# Altium PCB arm_board_n.PcbDoc (part 2 of 3)
Units mm, origin at the board's own origin, x right, y up, seen from the top; angles counter-clockwise.
Board outline 101.22 x 59.56 mm, 4 copper layers (Top Layer, Int1 (GND), Int2 (PWR), Bottom Layer), stack 1.565 mm thick; 88 components, 104 nets, 470 pads, 175 vias.
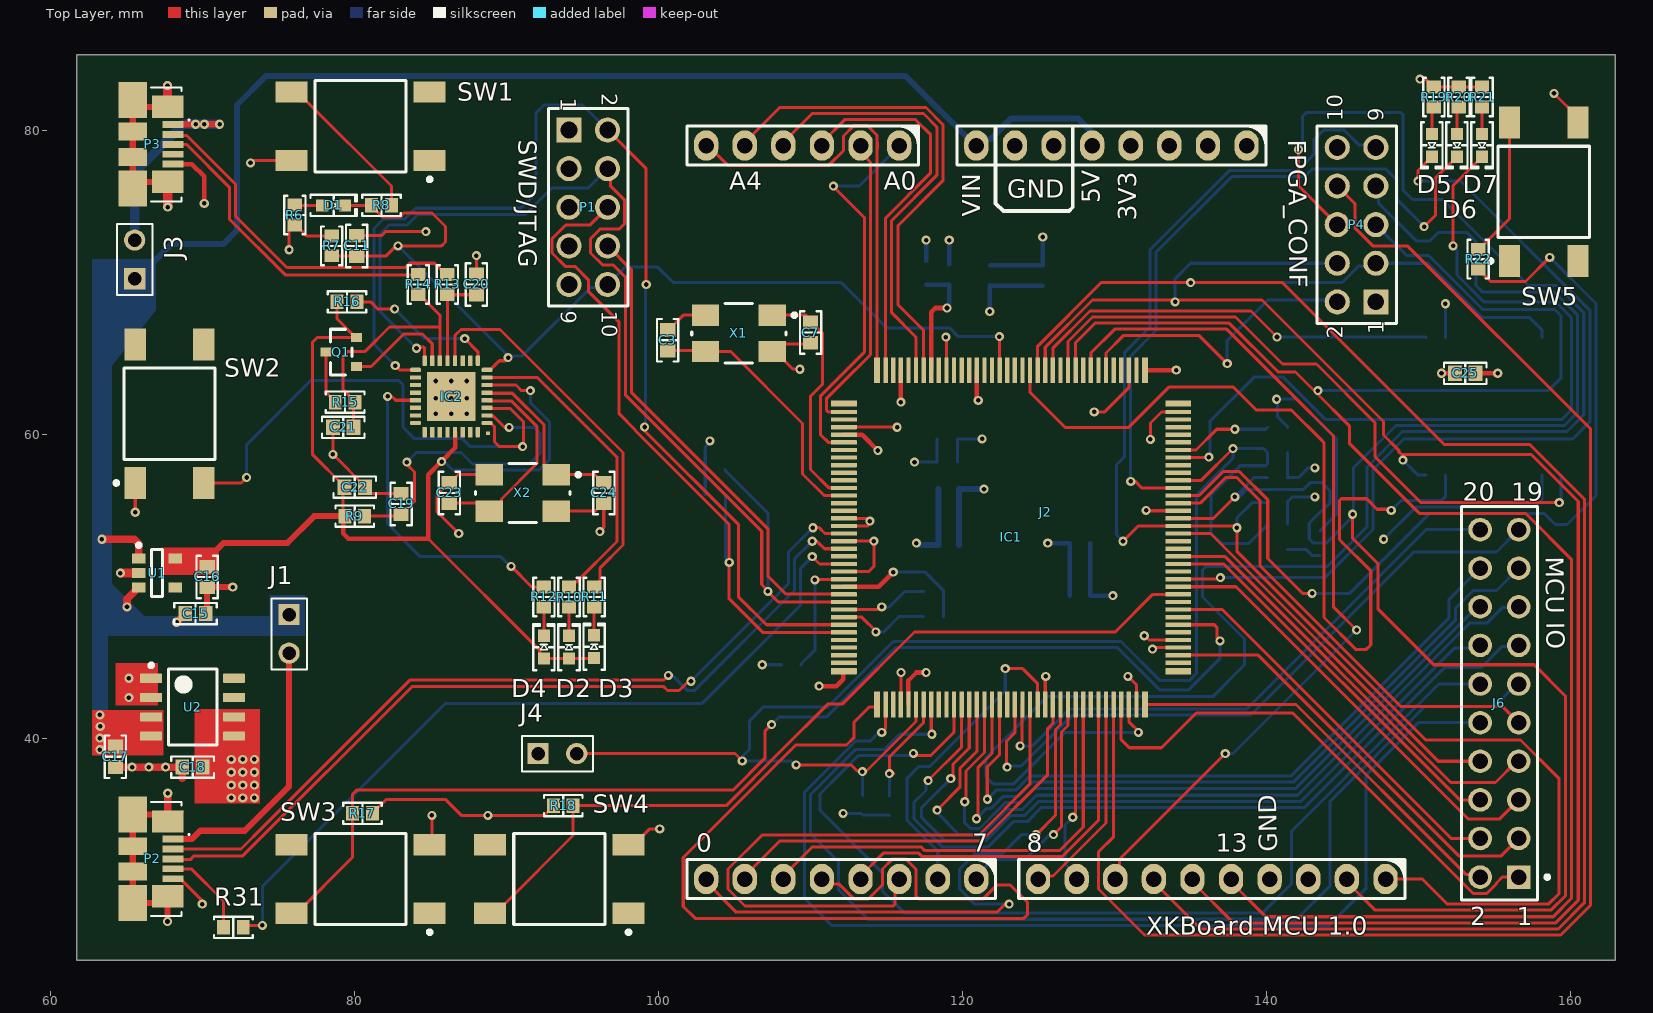
[diagram p0: Top Layer view]

## Part data (continued)
X1 X2: library part CMP-0277-00003-1, "Ceramic Surface Mount Low Profile Quartz Crystal, 8 MHz, -20 to 70 degC, 4-Pin 6 x 3.6 x 1.2 mm SMD, RoHS, 1000pcs / Reel", Frequency="8 MHz", Load Capacitance CL="18 pF Typ.", Manufacturer=Abracon, PartNumber=ABMM2-8.000MHZ-E2-T, Shunt Capacitance C0="7 pF Max.", Temperature Range="-20 to 70 degC", ComponentLink1Description="Manufacturer URL", ComponentLink1URL=http://www.abracon.com/, ComponentLink2Description=Datasheet, ComponentLink2URL=http://www.abracon.com/Resonators/ABMM2.pdf, ComponentLink3Description="Package Specification", ComponentLink3URL=http://www.abracon.com/Resonators/ABMM2.pdf, DatasheetVersion=Jan-13, ESR="72 Ohm Max.", Mounting Technology="Surface Mount", PackageDescription="4-Pin SMD, Body 6 x 3.6 mm, Pitch 4.4 mm", Packing="1000pcs / Reel", RoHS=TRUE

## Via types
v1: diameter 0.6, hole 0.3, Top Layer to Bottom Layer, 175 vias

## Nets (pads, with @x,y where several pads share a name; then routed paths per layer and width w, separated by ;. In a path a pad name is that pad's centre, name@x,y a point inside that pad or via, vN(x,y) a via of type N, cw(c..) or ccw(c..) an arc to the next point about the centre after c; other vN are vias at no path point)
3V3_DEBUG: C16.2 C22.2 D2.1 D3.1 D4.1 IC2.6 IC2.29 Q1.2 R9.2 R16.1 U1.5 | length 74.1
  Top Layer w0.2: C16.2@69.901,51.687 69.901,51.637 70.251,51.287 C16.2@70.301,51.287 ; R16.1@78.852,68.707 78.852,67.574 Q1.2@80.071,66.355 ; R9.2@79.36,54.61 79.248,54.61 79.248,56.428 C22.2@79.335,56.515 79.335,56.565 77.216,58.684 77.216,66.04 77.531,66.355 Q1.2@80.071,66.355 ; Q1.2@80.121,66.355 Q1.2@80.071,66.355 ; 84.836,53.135 92.182,45.789 92.182,45.513 D4.1@92.456,45.239 94.107,45.239 95.728,45.239 D3.1@95.758,45.269 ; IC2.6@88.71,63.234 90.614,63.234 90.983,62.865 v1(91.567,62.865)
  Top Layer w0.3: R9.2@79.248,54.61 79.248,53.467 79.58,53.135 84.836,53.135 84.836,57.332 85.705,58.201 v1(85.723,58.201) ; v1@85.723,58.219 86.61,59.106 IC2.29@86.61,60.134
  Top Layer w0.4: 69.723,52.197 70.722,52.197 71.378,52.853 75.586,52.853 77.343,54.61 R9.2@79.248,54.61
  Bottom Layer w0.2: v1(85.723,58.201) 85.73,58.208 85.896,58.208 86.465,57.639 92.139,57.639 92.837,58.337 92.837,60.797 91.567,62.067 v1(91.567,62.865)
3V3_MCU: C1.2 C2.2 C4.2 C5.2 C6.2 C8.2 C9.2 C10.2 C12.2 C13.2 C14.2 C18.2 C25.2 FB1.1 IC1.P5 IC1.P16 IC1.P17 IC1.P25 IC1.P36 IC1.P41 IC1.P59 IC1.P71 IC1.P77 IC1.P94 IC1.P107 IC1.P111 IC1.P131 IC1.P141 J2.2 J2.4 P1.1 R2.2 R3.2 R4.2 R5.2 R6.2 R7.1 R17.2 R18.2 R19.1 R20.1 R21.1 R23.2 R24.2 R25.2 R26.2 U2.5 U2.6 U3.2 | length 108
  Top Layer w0.2: v1(75.692,72.136) 75.692,73.391 75.698,73.397 75.698,73.447 76.023,73.772 R6.2@76.073,73.772 76.123,73.772 76.855,73.04 R7.1@78.486,73.04 ; R17.2@81.168,35.052 82.07,35.954 86.005,35.954 87.057,34.902 92.468,34.902 93.076,35.51 R18.2@93.076,35.56 ; IC1.P36@112.143,44.303 112.19,44.35 IC1.P36@112.19,44.403 ; IC1.P17@112.19,53.963 113.766,53.963 113.899,54.096 v1(113.899,54.279) 113.715,54.463 IC1.P16@112.19,54.463 ; v1(114.427,58.928) v1@114.479,58.928 ; v1@120.94,62.429 121.031,62.338 v1(121.031,62.23) ; IC1.P59@125.44,42.213 125.44,44.033 v1(125.476,44.069) ; v1(128.667,61.468) 129.353,61.468 130.94,63.055 IC1.P111@130.94,64.213 ; v1(130.883,44.069) 131.44,43.512 IC1.P71@131.44,42.213 ; v1(131.953,46.736) 131.997,46.736 132.27,46.463 IC1.P77@134.19,46.463 ; v1(132.08,54.991) 132.108,54.963 IC1.P94@134.19,54.963 ; v1(132.36,59.664) 132.36,60.732 133.091,61.463 IC1.P107@134.19,61.463 ; v1(150.096,83.359) 150.478,83.359 R19.1@151.003,82.834 R20.1@152.654,82.834 R21.1@154.178,82.834
  Top Layer w0.3: v1(110.562,43.425) 111.687,43.425 112.143,43.881 IC1.P36@112.143,44.303 ; IC1.P25@112.19,49.963 114.479,49.963 v1(115.443,50.927) ; IC1.P5@112.19,59.963 113.392,59.963 v1(114.427,58.928) ; v1(115.94,62.114) IC1.P141@115.94,64.213 ; IC1.P41@116.44,42.213 116.44,43.796 116.967,44.323 v1(117.602,44.323) ; v1@120.94,62.429 IC1.P131@120.94,64.213 ; C25.2@153.75,64.008 v1(155.214,64.008)
  Bottom Layer w0.2: R3.2@103.072,56.032 R2.2@103.072,57.683 103.072,59.17 103.378,59.476 v1(103.378,59.563) ; v1(115.443,50.927) 117.54,50.927 118.76,49.707 R4.2@118.76,49.657 118.745,49.642 R5.2@118.745,48.006 ; v1(116.84,58.166) C1.2@118.324,58.166 C2.2@118.324,59.69 ; C14.2@121.793,71.16 C14.2@121.833,71.12 ; C10.2@128.397,49.378 C10.2@128.452,49.323 ; v1(129.896,49.378) v1@129.921,49.403 ; R23.2@141.366,58.801 141.366,57.165 R25.2@141.351,57.15 142.113,57.15 142.748,57.785 v1(143.184,57.785) ; R24.2@141.381,54.102 141.366,54.117 R26.2@141.366,55.499 141.366,55.549 141.691,55.874 143.178,55.874 v1(143.184,55.88) ; v1(147.701,53.086) 149.811,55.196 157.637,55.196 158.115,55.674 U3.2@158.115,57.324
  Bottom Layer w0.3: FB1.1@117.602,71.414 v1(117.602,72.771) ; C14.2@121.833,71.12 C13.2@123.546,71.12 C12.2@125.273,71.12 v1(125.273,72.974) ; C8.2@128.397,52.832 C9.2@128.397,51.105 C10.2@128.397,49.378 v1(129.896,49.378)
  Bottom Layer w0.4: v1(116.967,52.832) 117.021,52.832 117.148,52.705 C4.2@118.411,52.705 C5.2@118.411,54.483 C6.2@118.411,56.388
  other v1: 88.773,34.925 71.882,36.068 72.644,36.068 73.406,36.068 71.882,36.915 72.644,36.915 73.406,36.915 71.882,37.761 72.644,37.761 73.406,37.761 71.882,38.608 72.644,38.608 73.406,38.608
5V: C15.2 C17.2 J1.1 J2.5 J2.8 J3.1 U1.1 U1.3 U2.3 U2.4 | length 90
  Top Layer w0.2: 64.262,40.448 64.578,40.132
  Top Layer w0.5: v1(63.373,53.086) 65.506,53.086 65.799,52.793 U1.1@65.799,51.816 ; C17.2@64.262,39.45 64.262,40.448 64.262,41.446 66.573,41.446 U2.3@66.617,41.402 ; 64.578,40.132 U2.4@66.617,40.132 ; v1(65.024,48.641) 65.024,49.141 U1.3@65.799,49.916 ; v1(68.29,47.625) C15.2@68.864,48.199
  Bottom Layer w0.2: 128.367,80.008 128.367,79.155 J2.5@128.528,78.994
  Bottom Layer w0.3: J2.8@120.822,78.994 J2.8@120.908,78.994 121.337,79.423 121.847,79.423
  Bottom Layer w0.4: J3.1@65.532,70.231 66.031,70.73 66.158,70.73 67.935,72.507 71.364,72.507 72.263,73.406 72.263,81.661 74.168,83.566 116.25,83.566 J2.8@120.822,78.994 ; 121.847,79.423 123.206,80.782 127.593,80.782 128.367,80.008
  other v1: 63.246,39.243 63.246,40.005 63.262,40.771 63.246,41.529
A10: IC1.P38 J6.10 | length 70.7
  Top Layer w0.2: v1(114.681,40.386) 114.94,40.645 IC1.P38@114.94,42.213
  Bottom Layer w0.2: v1(114.681,40.386) 114.499,40.386 113.929,39.816 112.968,39.816 109.601,36.449 109.601,29.464 111.379,27.686 144.119,27.686 146.558,30.125 146.558,37.592 149.987,41.021 J6.10@154.051,41.021
A11: IC1.P44 J6.11 | length 73.8
  Top Layer w0.2: IC1.P44@117.94,42.213 117.94,40.302 v1(117.983,40.259)
  Bottom Layer w0.2: v1(117.983,40.259) 115.876,40.259 114.879,39.262 112.98,39.262 110.006,36.288 110.006,33.694 111.848,31.853 111.848,30.011 113.773,28.086 141.979,28.086 144.184,30.291 144.184,35.853 150.427,42.096 154.999,42.096 156.464,43.561 J6.11@156.591,43.561
A12: IC1.P47 J6.12 | length 68.8
  Top Layer w0.2: v1(116.765,39.003) 116.883,38.886 116.883,38.862 117.908,38.862 119.44,40.394 IC1.P47@119.44,42.213
  Bottom Layer w0.2: v1(116.765,39.003) 116.765,38.979 116.648,38.862 113.145,38.862 112.014,37.731 110.617,36.334 110.617,35.254 114.724,31.147 114.724,29.951 116.189,28.486 139.716,28.486 141.644,30.414 141.644,33.879 151.326,43.561 J6.12@154.051,43.561
A13: IC1.P48 J6.13 | length 54.8
  Top Layer w0.2: v1(117.729,37.211) 119.94,39.422 IC1.P48@119.94,42.213
  Bottom Layer w0.2: v1(117.729,37.211) 117.591,37.073 117.591,36.559 116.808,35.775 116.808,34.703 118.656,32.855 121.686,32.855 123.338,34.507 124.261,34.507 125.2,35.446 142.507,35.446 151.697,44.636 154.106,44.636 155.516,46.046 156.536,46.046 J6.13@156.591,46.101
A14: IC1.P49 J6.14 | length 51.4
  Top Layer w0.2: v1(119.221,37.338) 119.357,37.474 119.357,38.273 120.44,39.356 IC1.P49@120.44,42.213
  Bottom Layer w0.2: v1(119.221,37.338) 118.159,36.276 117.302,35.419 117.302,34.792 117.384,34.71 117.384,34.707 118.836,33.255 121.52,33.255 123.172,34.907 124.096,34.907 125.034,35.846 142.272,35.846 152.348,45.922 153.872,45.922 J6.14@154.051,46.101
A15: IC1.P50 J6.15 | length 53.3
  Top Layer w0.2: v1(118.327,35.269) 119.821,36.763 119.821,38.004 120.94,39.123 IC1.P50@120.94,42.213
  Bottom Layer w0.2: v1(118.327,35.269) 118.327,35.089 119.761,33.655 121.285,33.655 122.937,35.307 123.93,35.307 124.869,36.246 142.037,36.246 153.357,47.566 154.496,47.566 155.516,48.586 156.536,48.586 J6.15@156.591,48.641
A16: IC1.P51 J6.16 | length 48.4
  Top Layer w0.2: v1(120.142,35.814) 120.221,35.893 120.221,37.839 121.44,39.058 IC1.P51@121.44,42.213
  Bottom Layer w0.2: v1(120.142,35.814) 120.142,34.436 120.523,34.055 121.119,34.055 122.841,35.777 123.834,35.777 124.76,36.703 141.928,36.703 153.866,48.641 J6.16@154.051,48.641
A17: IC1.P52 J6.17 | length 50.9
  Top Layer w0.2: v1(120.918,34.703) 121.031,34.815 121.031,38.083 121.94,38.992 IC1.P52@121.94,42.213
  Bottom Layer w0.2: v1(120.918,34.703) 121.597,35.381 121.88,35.381 122.675,36.177 123.668,36.177 124.594,37.103 141.763,37.103 152.419,47.759 152.419,48.529 153.606,49.716 155.126,49.716 J6.17@156.591,51.181
A18: IC1.P53 J6.18 | length 46
  Top Layer w0.2: v1(121.631,35.981) 121.624,35.988 121.624,38.11 122.44,38.926 122.44,39.624 IC1.P53@122.44,42.213
  Bottom Layer w0.2: v1(121.631,35.981) 122.227,36.577 123.502,36.577 124.429,37.503 141.597,37.503 152.019,47.925 152.019,49.149 J6.18@154.051,51.181
A19: IC1.P55 J6.19 | length 44.6
  Top Layer w0.2: v1@122.936,37.965 v1(122.936,38.1) 122.89,38.146 122.89,39.805 123.44,40.355 IC1.P55@123.44,42.213
  Bottom Layer w0.2: v1(122.936,38.1) 123.007,38.171 123.871,38.171 127.21,41.51 138.943,41.51 149.689,52.256 155.126,52.256 J6.19@156.591,53.721
A20: IC1.P56 J6.20 | length 38.9
  Top Layer w0.2: v1(123.783,39.497) 123.9,39.614 123.913,39.614 123.913,42.186 IC1.P56@123.94,42.213
  Bottom Layer w0.2: v1(123.783,39.497) 124.625,39.497 127.038,41.91 138.684,41.91 150.495,53.721 J6.20@154.051,53.721